# Altium PCB BOARD.PcbDoc
Units mm, origin at the board's own origin, x right, y up, seen from the top; angles counter-clockwise.
Board outline 25.6 x 34.2 mm, 2 copper layers (Top Layer, Bottom Layer), stack 0.46 mm thick; 48 components, 35 nets, 178 pads, 118 vias.
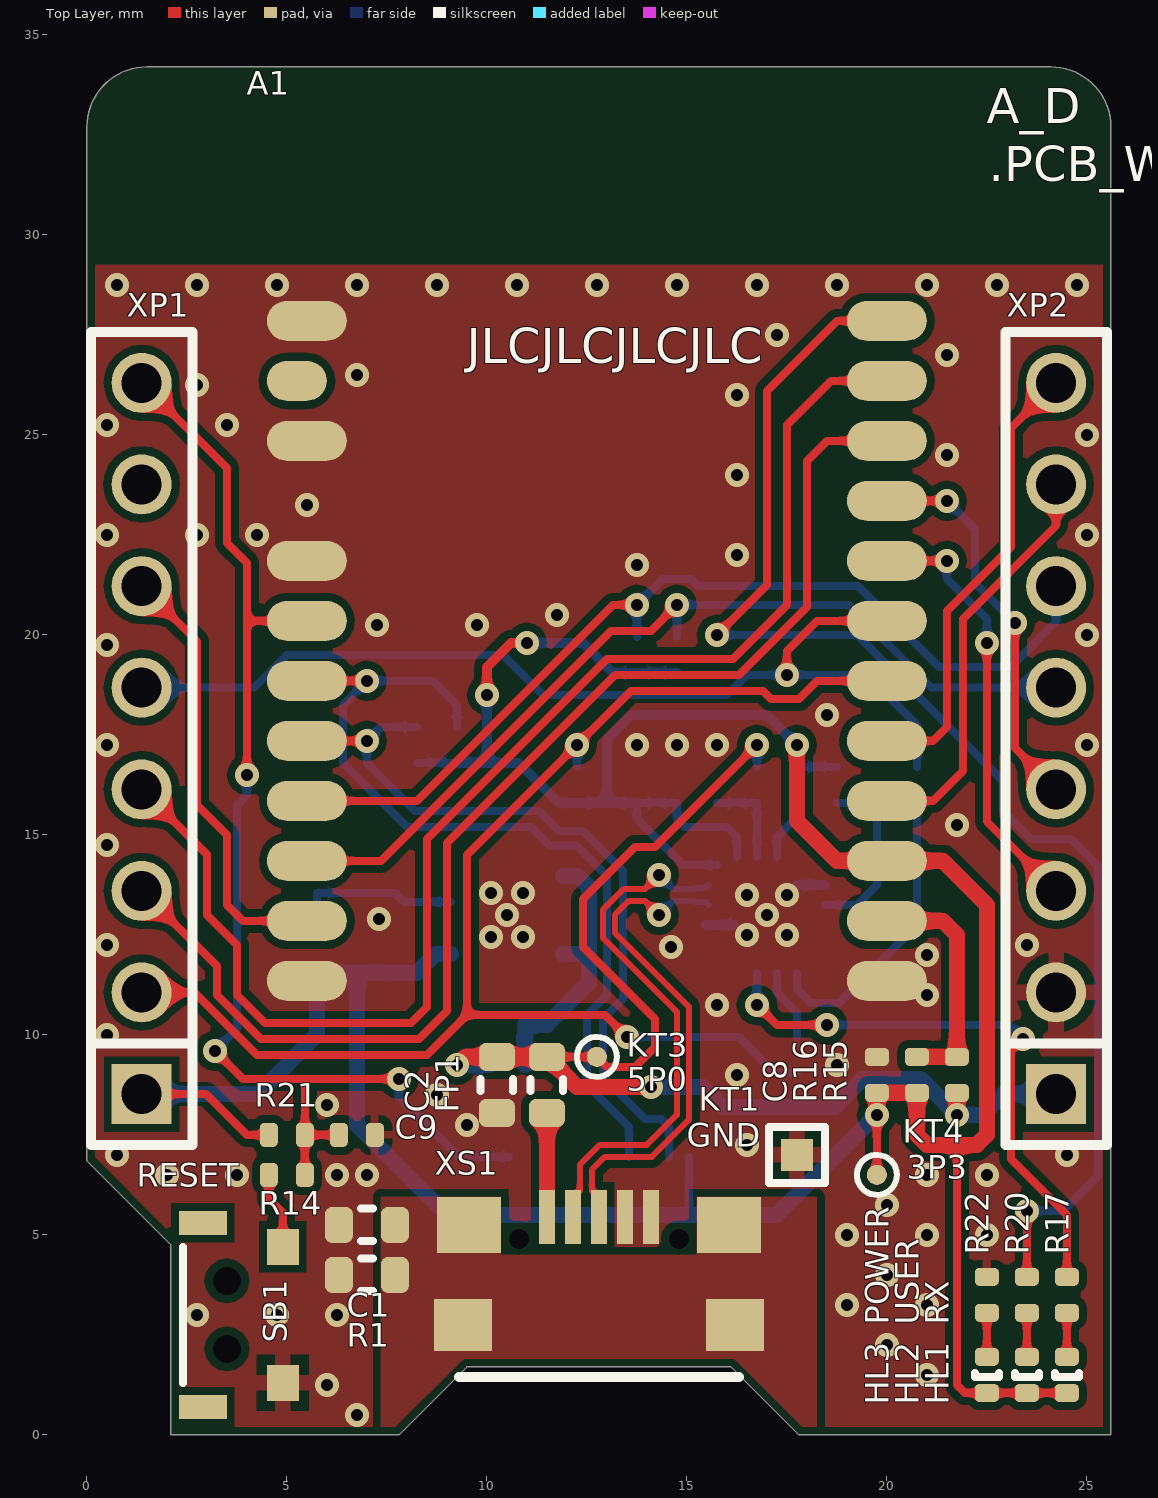
[diagram p0: Top Layer view]
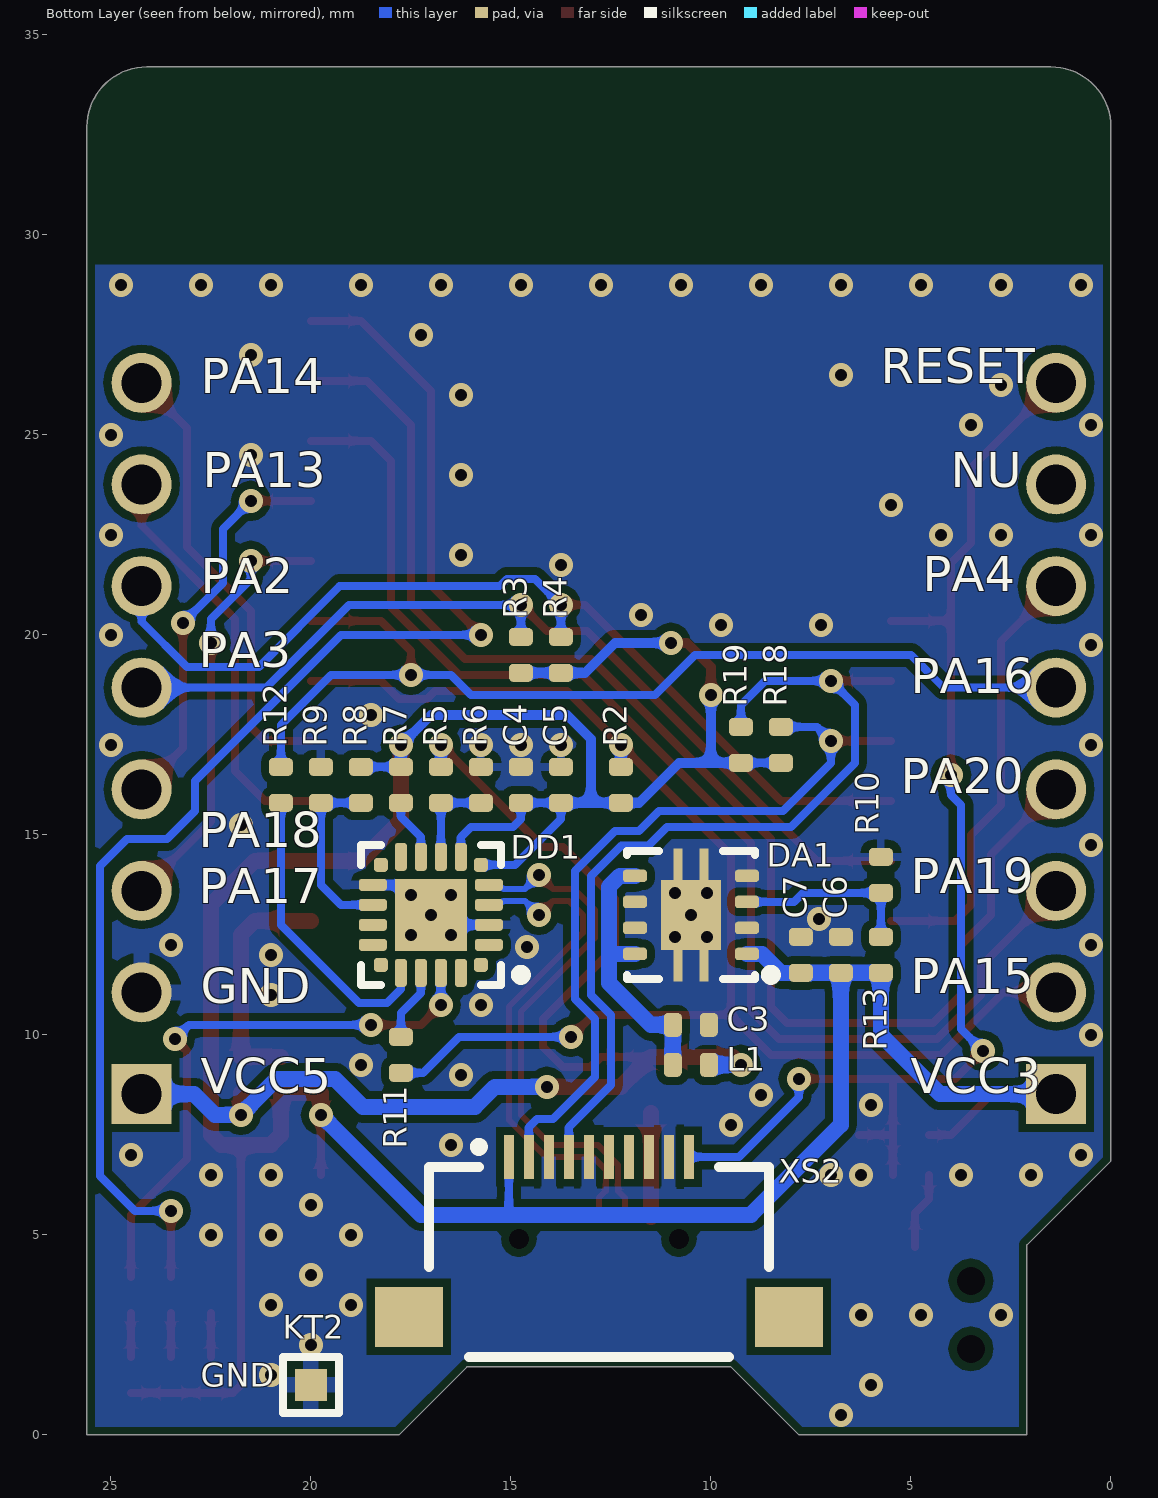
[diagram p1: Bottom Layer view, seen from below]
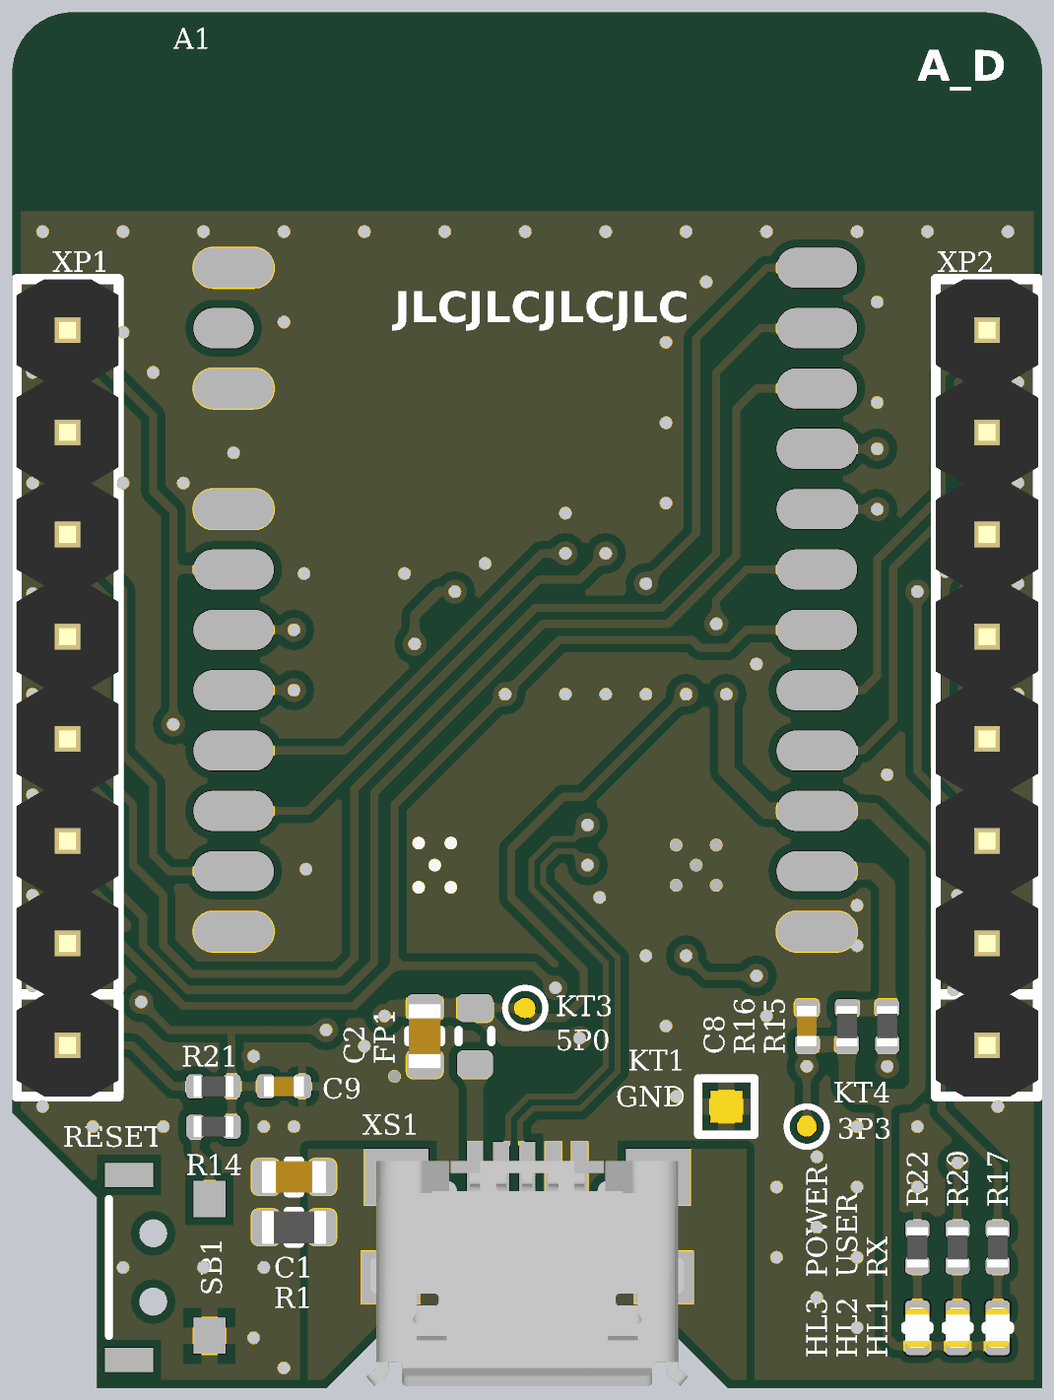
[diagram p2: 3D render of the assembled board from above, using the file's embedded part models]
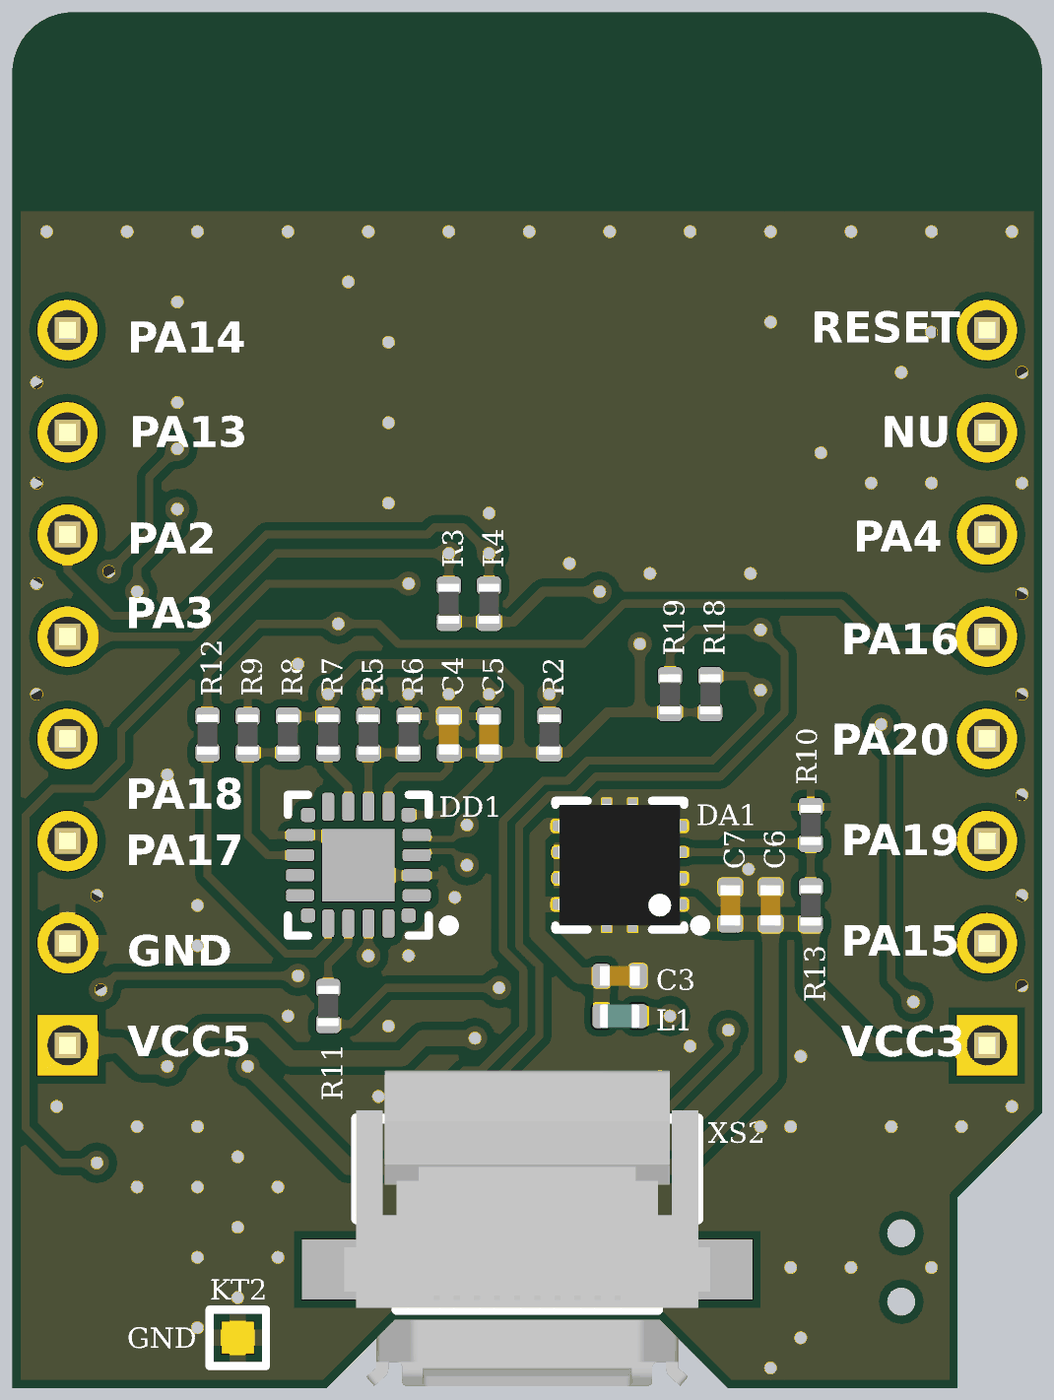
[diagram p3: 3D render of the assembled board from below, using the file's embedded part models]

## Layer stack, top to bottom
Top Solder: solder mask 0.01, Solder Resist, Dk 3.5
Top Layer: signal copper 0.03
Dielectric1: core 0.4, FR-4, Dk 4.2
Bottom Layer: signal copper 0.03
Bottom Solder: solder mask 0.01, Solder Resist, Dk 3.5

## Board outline
2.1,0 2.1,4.75 0,6.85 0,32.7 cw(c1.5,32.7) 1.5,34.2 24.1,34.2 cw(c24.1,32.7) 25.6,32.7 25.6,0 17.8,0 16.1,1.7 9.5,1.7 7.8,0

## Design rules (kind name [scope] priority, off if disabled: settings)
AssemblyTestPointUsage [All] p1 off:
AssemblyTestpoint [All] p1 off: testpointundercomponent=TRUE minsize=1.016 maxsize=2.54 preferedsize=1.524 minholesize=0 maxholesize=1.016 preferedholesize=0.813 testpointgrid=0.025 usegrid=TRUE gridtolerance=0 allowsidetop=TRUE allowsidebottom=TRUE
BoardOutlineClearance [All] p1: gap=0.2 ignorepadtopadclearanceinfootprint=FALSE
Clearance Clearance_ANT [InNetClass('ANT_Class') vs InPolygon] p1: gap=0.6 ignorepadtopadclearanceinfootprint=FALSE except(0: Arc-Hole Track-Hole SMDPad-Hole THPad-Hole Via-Hole Fill-Hole Poly-Hole Region-Hole Text-Hole)
Clearance Clearance_GND_Poly [(InNet('GND') AND InPolygon )] p2: gap=0.2 ignorepadtopadclearanceinfootprint=FALSE except(0: Arc-Hole Track-Hole SMDPad-Hole THPad-Hole Via-Hole Fill-Hole Poly-Hole Region-Hole Text-Hole)
Clearance [All] p3: gap=0.15 ignorepadtopadclearanceinfootprint=FALSE except(0: Arc-Hole Track-Hole SMDPad-Hole THPad-Hole Via-Hole Fill-Hole Poly-Hole Region-Hole Text-Hole)
ComponentClearance [All] p1 off: gap=0.25 collisioncheckmode=3 verticalgap=0.25 showdistances=FALSE
DiffPairsRouting [All] p1: maxlimit=0.4 minlimit=0.15 mostfreqgap=0.2 toplayer_minwidth=0.15 toplayer_maxwidth=0.4 toplayer_prefwidth=0.15 bottomlayer_minwidth=0.15 bottomlayer_maxwidth=0.4 bottomlayer_prefwidth=0.15 maxuncoupledlength=12
FabricationTestPointUsage [All] p1 off: valid=0 allowmultiple=FALSE
FabricationTestpoint [All] p1 off: side=3 testpointundercomponent=TRUE minsize=1.016 maxsize=2.54 preferedsize=1.524 minholesize=0 maxholesize=1.016 preferedholesize=0.813 testpointgrid=0.025 allowsidetop=TRUE allowsidebottom=TRUE usegrid=TRUE gridtolerance=0
Height [All] p1: minheight=0 maxheight=25 prefheight=25
HoleSize [All] p1: absolutevalues=TRUE maxlimit=6 minlimit=0.3 maxpercent=80.000 minpercent=20.000
HoleToHoleClearance [All] p1: gap=0.25 allowstackedmicrovias=TRUE
MatchedLengths "Schematic Matched Net Lengths_3" [InNet('USBD_N')] p1: tolerance=1 checknetsindiffpair=TRUE checkdiffpairvsdiffpair=FALSE checkxsignals=FALSE checkothers=FALSE
MatchedLengths "Schematic Matched Net Lengths_2" [InNet('USBD_P')] p2: tolerance=1 checknetsindiffpair=TRUE checkdiffpairvsdiffpair=FALSE checkxsignals=FALSE checkothers=FALSE
MinimumSolderMaskSliver [All] p1 off: minsoldermaskwidth=0.254
PlaneClearance [All] p1: clearance=0.5
PlaneConnect [All] p1: planeconnectstyle=Relief reliefexpansion=0.5 reliefentries=4 reliefconductorwidth=0.25 reliefairgap=0.25
PolygonConnect PolygonConnect_DirectConnect [InComponentClass('DirectConnect')] p1: connectstyle=Direct reliefconductorwidth=0.254 reliefentries=4 polygonreliefangle="90 Angle" airgapwidth=0.254
PolygonConnect PolygonConnect_Components [InComponent('C*') OR InComponent('R*') OR InComponent('NR*') OR InComponent('DA*') OR InComponent('DD*') OR InComponent('HL*')] p2: connectstyle=Relief reliefconductorwidth=0.2 reliefentries=4 polygonreliefangle="90 Angle" airgapwidth=0.2
PolygonConnect PolygonConnect_Connectors [All vs (InPadClass('All Pads'))] p3: connectstyle=Relief reliefconductorwidth=0.4 reliefentries=4 polygonreliefangle="90 Angle" airgapwidth=0.25
PolygonConnect PolygonConnect_Via [All] p4: connectstyle=Direct reliefconductorwidth=0.254 reliefentries=4 polygonreliefangle="90 Angle" airgapwidth=0.254
RoutingCorners [All] p1: cornerstyle=45-Degree minsetback=1.5 maxsetback=3.5
RoutingVias [All] p1: holewidth=0.6 width=1.2 viastyle="Through Hole" minholewidth=0.3 minwidth=0.6 maxholewidth=1 maxwidth=2
SMDEntry [All] p1: side=TRUE corner=TRUE anyangle=TRUE
SilkToSilkClearance [All] p1 off: silktosilkclearance=0.254
SilkToSolderMaskClearance [IsPad] p1 off: minsilkscreentomaskgap=0.254 clearancetoexposedcopper=TRUE
SolderMaskExpansion [All] p1: expansion=0.025
Width [All] p1: maxlimit=8 minlimit=0.15 preferedwidth=0.6
Width Width_TrackEnds [All] p2 off: maxlimit=0.25 minlimit=0.25 preferedwidth=0.25 checkconnectedcopper=TRUE
15 further rules are at their usual default settings.

## Classes and differential pairs
component class DirectConnect: A1 C1 C2 C3 C4 C6 C7 C8 DA1 L1 R1 XS1
differential pair class USB: USBD
differential pair USBD: +USBD_P -USBD_N

## Components (designator, comment, footprint, x,y, rotation, side; value= is the part's Value field where it differs from the comment)
A1 "AFM201Tx-Series" AFM201Tx-Series 12.75,22.25 r0 top locked value=AFM201TI
C1 "Capacitor" C0603_L 7,5.25 r0 top value=0.1uF
C2 "Capacitor" C0603_L 10.25,8.75 r90 top value=10uF
C3 "Capacitor" C0402_L 10.5,10.25 r0 bottom value=4.7uF
C4 "Capacitor" C0402_L 14.75,16.25 r270 bottom value=4.7uF
C5 "Capacitor" C0402_L 13.75,16.25 r270 bottom value=0.1uF
C6 "Capacitor" C0402_L 6.75,12 r270 bottom value=4.7uF
C7 "Capacitor" C0402_L 7.75,12 r270 bottom value=4.7uF
C8 "Capacitor" C0402_L 19.75,9 r270 top value=4.7uF
C9 "Capacitor" C0402_L 6.75,7.5 r180 top value=0.1uF
DA1 "TPS73701DRB" VSON-8_065P300X300X100_N 10.5,13 r90 bottom value=TPS73701DRBR
DD1 "CP2102N-xxx-GQFN20" QFN-20_050P300X300X080_N 17,13 r0 bottom value=CP2102N-A01-GQFN20
FP1 "Fuse_PTC" F0603_L_H075 11.5,8.75 r90 top value=0603L100SLYR
HL1 "RX" LD0402_L 24.5,1.5 r90 top value=KPHHS-1005SURCK
HL2 "USER" LD0402_L 23.5,1.5 r90 top value=KPHHS-1005QBC-D-V
HL3 "POWER" LD0402_L 22.5,1.5 r90 top value=KPHHS-1005CGCK
KT1 "GND" TP-SMT-R-0.8mm 17.75,7 r0 top value=TestPoint-SMT
KT2 "GND" TP-SMT-R-0.8mm 20,1.25 r180 bottom value=TestPoint-SMT
KT3 "5P0" TP-SMT-C-0.5mm 12.75,9.45 r0 top value=TestPoint-SMT
KT4 "3P3" TP-SMT-C-0.5mm 19.75,6.5 r0 top value=TestPoint-SMT
L1 "FerriteBead" L0402_L 10.5,9.25 r0 bottom value=BLM15PD121SN1D
R1 "Resistor" R0603_L 7,4 r0 top value=0
R2 "Resistor" R0402_L 12.25,16.25 r90 bottom value=10k
R3 "Resistor" R0402_L 14.75,19.5 r90 bottom value=10k
R4 "Resistor" R0402_L 13.75,19.5 r90 bottom value=10k
R5 "Resistor" R0402_L 16.75,16.25 r270 bottom value=22.1k
R6 "Resistor" R0402_L 15.75,16.25 r270 bottom value=47k
R7 "Resistor" R0402_L 17.75,16.25 r90 bottom value=10k
R8 "Resistor" R0402_L 18.75,16.25 r90 bottom value=10k
R9 "Resistor" R0402_L 19.75,16.25 r270 bottom value=0
R10 "Resistor" R0402_L 5.75,14 r270 bottom value=12k
R11 "Resistor" R0402_L 17.75,9.5 r270 bottom value=0
R12 "Resistor" R0402_L 20.75,16.25 r90 bottom value=0
R13 "Resistor" R0402_L 5.75,12 r270 bottom value=22.1k
R14 "Resistor" R0402_L 5,6.5 r0 top value=20
R15 "Resistor" R0402_L 21.75,9 r270 top value=0
R16 "Resistor" R0402_L 20.75,9 r270 top value=0
R17 "Resistor" R0402_L 24.5,3.5 r270 top value=1k
R18 "Resistor" R0402_L 8.25,17.25 r90 bottom value=10k
R19 "Resistor" R0402_L 9.25,17.25 r90 bottom value=10k
R20 "Resistor" R0402_L 23.5,3.5 r270 top value=1k
R21 "Resistor" R0402_L 5,7.5 r0 top value=10k
R22 "Resistor" R0402_L 22.5,3.5 r270 top value=1k
SB1 "RESET" 1TS003B-Series 3.5,3 r90 top locked value=1TS003B-1600-3500A-CT
XP1 "Text" PLS-8 1.37,17.41 r90 top locked value=PLS-8
XP2 "Text" PLS-8 24.23,17.41 r90 top locked value=PLS-8
XS1 "Text" 1981568-1 12.8,3 r0 top locked value=1981568-1
XS2 "JTAG" XF2M-1015-1A 12.8,4.7 r0 bottom locked value=XF2M-1015-1A

## Footprints (in the part's own frame and the unit in brackets; to place one, negate y for a bottom-side part, rotate by r counter-clockwise, add the part's x,y. Pads: shape width x height; smd on the part's side, far side on the other; paste and mask are expansions set on the pad)
1TS003B-Series [mm]
  rect 0.6x1.2 smd: 0(-2.3,0.6) 0(2.3,0.6)
  round 0.1 hole 0.7 unplated: 0(-0.85,0) 0(0.85,0)
  rect 0.9x0.8 smd: 1(-1.7,-1.4) 2(1.7,-1.4)
  silkscreen extent -1.7,1.1 1.7,1.1
1981568-1 [mm]
  round 0 hole 0.5 unplated: 0(-2,1.9) 0(2,1.9)
  rect 0.4x1.35 smd: 1(-1.3,2.45) 2(-0.65,2.45) 3(0,2.45) 4(0.65,2.45) 5(1.3,2.45)
  rect 1.45x1.3 smd: 6(-3.4,-0.25) 6(3.4,-0.25)
  rect 1.6x1.4 smd: 6(-3.25,2.25) 6(3.25,2.25)
  silkscreen extent -3.5,-1.55 3.5,-1.55, body extent -4,-2.95 4,2.65, height 2.79
AFM201Tx-Series [mm]
  oval 2x1 smd: 1(-7.25,5.6) 3(-7.25,2.6) 4(-7.25,-0.4) 5(-7.25,-1.9) 6(-7.25,-3.4) 7(-7.25,-4.9) 8(-7.25,-6.4) 9(-7.25,-7.9) 10(-7.25,-9.4) 11(-7.25,-10.9) 12(7.25,-10.9) 13(7.25,-9.4) 14(7.25,-7.9) 15(7.25,-6.4) 16(7.25,-4.9) 17(7.25,-3.4) 18(7.25,-1.9) 19(7.25,-0.4) 20(7.25,1.1) 21(7.25,2.6) 22(7.25,4.1) 23(7.25,5.6)
  oval 1.5x1 smd: 2(-7.5,4.1)
  Top Layer pour cut-out: 7.5,7 7.5,12 -7.5,12 -7.5,7
  Bottom Layer pour cut-out: 7.5,7 7.5,12 -7.5,12 -7.5,7
  body extent -7.5,-12 7.5,12, height 2.9
C0402_L [mm] "Chip Capacitor; Body 1.0 x 0.5 mm (LxW typ)"
  rrect50% 0.45x0.6 smd: 1(-0.45,0) 2(0.45,0)
  body extent -0.5,-0.25 0.5,0.25, height 0.61
C0603_L [mm] "Chip Capacitor; Body 1.6 x 0.8 mm (LxW typ)"
  rrect50% 0.7x0.9 smd: 1(-0.7,0) 2(0.7,0)
  silkscreen extent -0.15,-0.41 0.15,0.41, body extent -0.8,-0.4 0.8,0.4, height 0.91
F0603_L_H075 [mm] "1608M"
  rrect50% 0.7x0.9 smd: 1(-0.7,0) 2(0.7,0)
  silkscreen extent -0.15,-0.41 0.15,0.41, body extent -0.8,-0.4 0.8,0.4, height 0.75
L0402_L [mm] "Chip Coil; Body 1.0 x 0.5 mm (LxW typ)"
  rrect50% 0.45x0.6 smd mask+0.05: 1(-0.452,0) 2(0.452,0)
  body extent -0.5,-0.3 0.5,0.3, height 0.5
LD0402_L [mm] "Chip Led; Body 1.0 x 0.5 mm (LxW typ)"
  rrect50% 0.45x0.6 smd mask+0.05: 1(-0.452,0) 2(0.452,0)
  silkscreen extent -0.05,-0.3 0.05,0.3, body extent -0.5,-0.3 0.5,0.3, height 0.2
PLS-8 [mm]
  rect 1.5x1.5 hole 1: 1(-8.89,0)
  round 1.5 hole 1: 2(-6.35,0) 3(-3.81,0) 4(-1.27,0) 5(1.27,0) 6(3.81,0) 7(6.35,0) 8(8.89,0)
  silkscreen extent -10.16,-1.27 10.16,1.27, body extent -10.16,-1.27 10.16,1.27, height 8.9
QFN-20_050P300X300X080_N [mm]
  rrect50% 0.35x0.35 smd: 1(-1.25,1.25) 6(-1.25,-1.25) 11(1.25,-1.25) 16(1.25,1.25)
  rrect50% 0.7x0.3 smd: 2(-1.45,0.75) 3(-1.45,0.25) 4(-1.45,-0.25) 5(-1.45,-0.75) 12(1.45,-0.75) 13(1.45,-0.25) 14(1.45,0.25) 15(1.45,0.75)
  rrect50% 0.3x0.7 smd: 7(-0.75,-1.45) 8(-0.25,-1.45) 9(0.25,-1.45) 10(0.75,-1.45) 17(0.75,1.45) 18(0.25,1.45) 19(-0.25,1.45) 20(-0.75,1.45)
  rect 1.8x1.8 smd: TP(0,0)
  silkscreen extent -2.37,-1.75 1.75,1.75, body extent -1.5,-1.5 1.5,1.5, height 0.8
R0402_L [mm] "Chip Resistor; Body 1.0 x 0.5 mm (LxW typ)"
  rrect50% 0.45x0.6 smd: 1(-0.45,0) 2(0.45,0)
  body extent -0.5,-0.26 0.5,0.26, height 0.36
R0603_L [mm] "Chip Resistor; Body 1.6 x 0.8 mm (LxW typ)"
  rrect50% 0.7x0.9 smd: 1(-0.7,0) 2(0.7,0)
  silkscreen extent -0.15,-0.41 0.15,0.41, body extent -0.8,-0.41 0.8,0.41, height 0.46
TP-SMT-C-0.5mm [mm]
  round 0.5 smd paste-1: 1(0,0)
  silkscreen extent -0.5,-0.5 0.5,0.5
TP-SMT-R-0.8mm [mm]
  rect 0.8x0.8 smd paste-1: 1(0,0)
  silkscreen extent -0.7,-0.7 0.7,0.7
VSON-8_065P300X300X100_N [mm]
  rrect50% 0.31x0.6 smd paste-0.025: 1(-0.975,-1.4) 2(-0.325,-1.4) 3(0.325,-1.4) 4(0.975,-1.4) 5(0.975,1.4) 6(0.325,1.4) 7(-0.325,1.4) 8(-0.975,1.4)
  rect 0.825x0.23 smd: TP(-1.25,-0.325) TP(-1.25,0.325) TP(1.25,-0.325) TP(1.25,0.325)
  rect 1.75x1.5 smd: TP(0,0)
  silkscreen extent -1.62,-2.12 1.6,1.6, body extent -1.52,-1.52 1.52,1.52, height 1.04
XF2M-1015-1A [mm]
  rect 0.25x1.1 smd mask+0.025: 1(2.25,-2.25) 2(1.75,-2.25) 3(1.25,-2.25) 4(0.75,-2.25) 5(0.25,-2.25) 6(-0.25,-2.25) 7(-0.75,-2.25) 8(-1.25,-2.25) 9(-1.75,-2.25) 10(-2.25,-2.25)
  rect 1.7x1.5 smd mask+0.025: SH(-4.75,1.75) SH(4.75,1.75)
  silkscreen extent -4.25,-2.6 4.25,2.75, body extent -4.55,-3.2 4.55,2.7, height 2

## Part data
A1: library part AFM201TI, Manufacturer=99IOT, Operation Frequency=100MHz, Supply Current=200mA, Working Temperature Max=+85°С, Working Temperature Min=-20°С, Application Category=1, ClassName=DirectConnect, Functional Analog="AFM201TO, AFM201TP", I/O Lines=14, ID=7, Part Number=AFM201TI, Published=25.11.2019, Publisher="Andrew Danich", ROM/RAM=384K+2MB/256KB, Supply Operation=+3.0…3.6V, Supported Interfaces="SWD, SPI, I2C, UART, PWM, SDIO, RTC", Type=Модуль, Wireless Compatibility="802.11 b/g/n, Bluetooth 4.2"
C1: library part GRM188R72A104KA35D, Dielectric Type=X7R, Manufacturer=Murata, Tolerance=±10%, Voltage=100V, Working Temperature Max=+125°С, Working Temperature Min=-55°С, Application Category=1, ClassName=DirectConnect, ID=232, Part Number=GRM188R72A104KA35D, Published=18.05.2010, Publisher="Andrew Danich", Type=Конденсатор
C2: library part GRM188R60J106ME47D, Dielectric Type=X5R, Manufacturer=Murata, Tolerance=±20%, Voltage=6.3V, Working Temperature Max=+85°С, Working Temperature Min=-55°С, Application Category=1, ClassName=DirectConnect, ID=136, Part Number=GRM188R60J106ME47D, Published=18.05.2010, Publisher="Andrew Danich", Type=Конденсатор
C3 C4 C6 C7 C8: library part GRM155R60J475ME87D, Dielectric Type=X5R, Manufacturer=Murata, Tolerance=±20%, Voltage=6.3V, Working Temperature Max=+85°С, Working Temperature Min=-55°С, Application Category=1, ClassName=DirectConnect, ID=223, Part Number=GRM155R60J475ME87D, Published=18.05.2010, Publisher="Andrew Danich", Type=Конденсатор
C5 C9: library part GCM155R71C104KA55D, Dielectric Type=X7R, Manufacturer=Murata, Tolerance=±10%, Voltage=16V, Working Temperature Max=+125°С, Working Temperature Min=-55°С, Application Category=1, Functional Analog=GRM155R71C104KA88D, ID=163, Part Number=GCM155R71C104KA55D, Published=18.05.2010, Publisher="Andrew Danich", Type=Конденсатор
DA1: library part TPS73701DRBR, Input Voltage=+2.2…5.5V, Manufacturer="Texas Instruments", Output Current=1A, Output Voltage=+1.2…5.5V, Working Temperature Max=+125°С, Working Temperature Min=-40°С, Application Category=1, ClassName=DirectConnect, Functional Analog=TPS73701DRBT, ID=26, Part Number=TPS73701DRBR, Published=25.03.2019, Publisher="Andrew Danich", Type=Микросхема
DD1: library part CP2102N-A01-GQFN20, Manufacturer="Silicon Labs", Supply Current=13.7mA, Working Temperature Max=+85°C, Working Temperature Min=-40°C, Application Category=1, Channels=1, Functional Analog=CP2102N-A02-GQFN20, ID=14, Input Interface=UART, OTG Support=No, Part Number=CP2102N-A01-GQFN20, Published=16.07.2019, Publisher="Andrew Danich", Supply Operation=+3.0…3.6V, Type=Микросхема, USB Speed Support="12 Mb/s", USB Type Support="USB 2.0"
FP1: library part 0603L100SLYR, Current Rating Max=50A, Hold Current=1A, Limit Voltage=6V, Manufacturer=Littelfuse, Resistance=0.12ohm, Trip Current=1.8A, Working Temperature Max=+85°С, Working Temperature Min=-40°С, Application Category=1, Functional Analog=-, ID=13, Part Number=0603L100SLYR, Published=25.0.2017, Type="Предохранитель самовосстанавливающийся"
HL1: library part KPHHS-1005SURCK, Color=Red, Forward Current=20mA, Forward Voltage=2.5V, Manufacturer=Kingbright, Power Dissipation=75mW, Working Temperature Max=+85°С, Working Temperature Min=-40°С, Application Category=1, ID=35, Leds=1, Luminous Flux=140, Part Number=KPHHS-1005SURCK, Published=03.12.2013, Publisher="Andrew Danich", Type="Индикатор единичный"
HL2: library part KPHHS-1005QBC-D-V, Color=Blue, Forward Current=20mA, Forward Voltage=3.3V, Manufacturer=Kingbright, Power Dissipation=120mW, Working Temperature Max=+85°С, Working Temperature Min=-40°С, Application Category=1, ID=24, Leds=1, Luminous Flux=60, Part Number=KPHHS-1005QBC-D-V, Published=03.12.2013, Publisher="Andrew Danich", Type="Индикатор единичный"
HL3: library part KPHHS-1005CGCK, Color=Green, Forward Current=20mA, Forward Voltage=2.1V, Manufacturer=Kingbright, Power Dissipation=75mW, Working Temperature Max=+85°С, Working Temperature Min=-40°С, Application Category=1, ID=25, Leds=1, Luminous Flux=60, Part Number=KPHHS-1005CGCK, Published=03.12.2013, Publisher="Andrew Danich", Type="Индикатор единичный"
KT1 KT2: library part TestPoint-SMT-GND, Manufacturer=-, Application Category=1, Application Type="On PCB Test Point", Functional Analog=-, ID=7, Part Number=TestPoint-SMT-GND, Published=03.03.2015, Publisher="Andrew Danich"
KT3 KT4: library part TestPoint-SMT, Manufacturer=-, Application Category=1, Application Type="On PCB Test Point", Functional Analog=-, ID=6, Part Number=TestPoint-SMT, Published=03.03.2015, Publisher="Andrew Danich"
L1: library part BLM15PD121SN1D, DC Resistance=0.09ohm, Inductor Type=EMIFIL, Manufacturer=Murata, Rated Current=1.3A, Tolerance=±25%, Working Temperature Max=+125°С, Working Temperature Min=-55°С, Application Category=1, ClassName=DirectConnect, ID=11, Impedance at 100Mhz=120ohm, Part Number=BLM15PD121SN1D, Published=14.11.2014, Publisher="Andrew Danich", Type=Дроссель
R1: library part RC0603JR-070R, Limit Voltage=50V, Manufacturer=Yageo, Temperature Coefficient=100ppm, Tolerance=±5%, Total Power Dissipation=0.1W, Working Temperature Max=+155°С, Working Temperature Min=-55°С, Application Category=1, ClassName=DirectConnect, Functional Analog="RC0603FR-070RL, CR0603-J/-000E", ID=5, Part Number=RC0603JR-070R, Published=24.03.2010, Publisher="Andrew Danich", Series Type=Thick-Film, Type=Резистор
R2 R3 R4 R7 R8 R18 R19 R21: library part RC0402JR-0710KL, Limit Voltage=50V, Manufacturer=Yageo, Temperature Coefficient=100ppm, Tolerance=±5%, Total Power Dissipation=0.1W, Working Temperature Max=+155°С, Working Temperature Min=-55°С, Application Category=1, ID=476, Part Number=RC0402JR-0710KL, Published=24.03.2010, Publisher="Andrew Danich", Series Type=Thick-Film, Type=Резистор
R5 R13: library part RC0402FR-0722K1L, Limit Voltage=50V, Manufacturer=Yageo, Temperature Coefficient=100ppm, Tolerance=±1%, Total Power Dissipation=0.1W, Working Temperature Max=+155°С, Working Temperature Min=-55°С, Application Category=1, ID=447, Part Number=RC0402FR-0722K1L, Published=24.03.2010, Publisher="Andrew Danich", Series Type=Thick-Film, Type=Резистор
R6: library part RC0402FR-0747KL, Limit Voltage=50V, Manufacturer=Yageo, Temperature Coefficient=100ppm, Tolerance=±1%, Total Power Dissipation=0.1W, Working Temperature Max=+155°С, Working Temperature Min=-55°С, Application Category=1, ID=528, Part Number=RC0402FR-0747KL, Published=24.03.2010, Publisher="Andrew Danich", Series Type=Thick-Film, Type=Резистор
R9 R11 R12 R15 R16: library part RC0402JR-070RL, Limit Voltage=50V, Manufacturer=Yageo, Temperature Coefficient=100ppm, Tolerance=±5%, Total Power Dissipation=0.1W, Working Temperature Max=+155°С, Working Temperature Min=-55°С, Application Category=1, ID=362, Part Number=RC0402JR-070RL, Published=24.03.2010, Publisher="Andrew Danich", Series Type=Thick-Film, Type=Резистор
R10: library part RC0402FR-0712KL, Limit Voltage=50V, Manufacturer=Yageo, Temperature Coefficient=100ppm, Tolerance=±1%, Total Power Dissipation=0.1W, Working Temperature Max=+155°С, Working Temperature Min=-55°С, Application Category=1, ID=318, Part Number=RC0402FR-0712KL, Published=24.03.2010, Publisher="Andrew Danich", Series Type=Thick-Film, Type=Резистор
R14: library part RC0402JR-0720RL, Limit Voltage=50V, Manufacturer=Yageo, Temperature Coefficient=100ppm, Tolerance=±5%, Total Power Dissipation=0.1W, Working Temperature Max=+155°С, Working Temperature Min=-55°С, Application Category=1, ID=369, Part Number=RC0402JR-0720RL, Published=24.03.2010, Publisher="Andrew Danich", Series Type=Thick-Film, Type=Резистор
R17 R20 R22: library part RC0402JR-071KL, Limit Voltage=50V, Manufacturer=Yageo, Temperature Coefficient=100ppm, Tolerance=±5%, Total Power Dissipation=0.1W, Working Temperature Max=+155°С, Working Temperature Min=-55°С, Application Category=1, ID=3, Part Number=RC0402JR-071KL, Published=24.03.2010, Publisher="Andrew Danich", Series Type=Thick-Film, Type=Резистор
SB1: library part 1TS003B-1600-3500A-CT, Isolator Resistance=100meg, Limit Current=50mA, Limit Voltage=12V, Manufacturer="Hongyuan Precision", Resistance=0.1ohm, Application Category=1, Backlight=NO, Functional Analog=1TS003B-1800-3500A-CT, Height=1.82mm, ID=38, Number of Contacts=2, Part Number=1TS003B-1600-3500A-CT, Published=17.04.2014, Publisher="Andrew Danich", Type=Переключатель
XP1 XP2: library part PLS-8, Limit Current=3A, Limit Voltage=250V, Resistance=15momh, Application Category=1, Connector Type=Male, ID=7, Part Number=PLS-8, Pins=8, Pitch=2.54mm, Published=07.03.2013, Publisher="Andrew Danich", Surface Finish=Gold, Type=Вилка
XS1: library part 1981568-1, Limit Current=1A, Limit Voltage=24V, Manufacturer="TE Connectivity", Application Category=1, ClassName=DirectConnect, Connector Type=Female, ID=30, Interface="USB 2.0", Max Data Rate="480 mbps", Mount Type=Surface, Part Number=1981568-1, Pins=9, Published=11.04.2016, Publisher="Andrew Danich", Type=Розетка
XS2: library part XF2M-1015-1A, Limit Current=500mA, Limit Voltage=50V, Manufacturer="Omron Electronics", Resistance=0.05ohm, Working Temperature Max=+85°С, Working Temperature Min=-30°С, Application Category=1, Connector Type=Female, ID=7, Part Number=XF2M-1015-1A, Pins=10, Pitch=0.5mm, Published=07.09.2015, Publisher="Viktor Klishin", Series=FPC, Type=Розетка

## Via types
v1: diameter 0.6, hole 0.3, Top Layer to Bottom Layer, tented both sides, 118 vias

## Nets (pads, with @x,y where several pads share a name; then routed paths per layer and width w, separated by ;. In a path a pad name is that pad's centre, name@x,y a point inside that pad or via, vN(x,y) a via of type N, cw(c..) or ccw(c..) an arc to the next point about the centre after c; other vN are vias at no path point)
GND: A1.1 A1.3 A1.4 A1.11 A1.12 C1.1 C2.1 C3.1 C4.1 C5.1 C6.1 C7.1 C8.1 C9.1 DA1.2 DA1.4 DA1.6 DA1.7 DA1.TP DD1.3 DD1.12 DD1.TP KT1.1 KT2.1 R1.1 R6.1 R9.1 R10.1 R22.1 SB1.1 XP2.2 XS1.4 XS1.5 XS2.3 XS2.5 XS2.9 | length 1.4
  Bottom Layer w0.25: DD1.3@15.475,12.75 DD1.TP@16.175,12.75 ; DD1.TP@17.75,13.75 DD1.12
  other v1: 6.75,0.5 6,1.25 21,1.5 20,2.25 2.75,3 4.75,3 6.25,3 19,3.25 21,3.25 20,4 19,5 21,5 22.5,5 20,5.75 2,6.5 3.75,6.5 6.25,6.5 7,6.5 21,6.5 22.5,6.5 0.75,7 24.5,7 16.5,7.25 9.5,7.75 6,8.25 8.75,8.5 16.25,9 18.75,9.25 0.5,10 15.75,10.75 21,11 21,12 14.6,12.2 0.5,12.25 23.5,12.25 10.1,12.45 10.9,12.45 16.5,12.5 17.5,12.5 7.3,12.9 10.5,13 17,13 16.5,13.5 17.5,13.5 10.1,13.55 10.9,13.55 0.5,14.75 21.75,15.25 0.5,17.25 13.75,17.25 14.75,17.25 15.75,17.25 25,17.25 18.5,18 0.5,19.75 25,20 7.25,20.25 9.75,20.25 11.75,20.5 13.75,21.75 16.25,22 0.5,22.5 2.75,22.5 4.25,22.5 25,22.5 5.5,23.25 16.25,24 21.5,24.5 25,25 0.5,25.25 3.5,25.25 16.25,26 2.75,26.25 6.75,26.5 21.5,27 17.25,27.5 0.75,28.75 2.75,28.75 4.75,28.75 6.75,28.75 8.75,28.75 10.75,28.75 12.75,28.75 14.75,28.75 16.75,28.75 18.75,28.75 21,28.75 22.75,28.75 24.75,28.75
LED_RX_N: DD1.19 R17.1 | length 14.5
  Top Layer w0.2: v1(16.75,10.75) 17.25,10.25 v1(18.5,10.25) ; v1(23.4,9.9) 23.1,9.6 23.1,6.9 24.5,5.5 R17.1
  Bottom Layer w0.2: v1(16.75,10.75) DD1.19 ; v1(18.5,10.25) 23.05,10.25 v1(23.4,9.9)
NetA1_13: A1.13 R15.1 R16.1 | length 5.9
  Top Layer w0.4: A1.13 21.4,12.85 21.75,12.5 R15.1 R16.1
NetC3_2: C3.2 DA1.5 DA1.8 L1.2 | length 6.9
  Bottom Layer w0.4: L1.2 10.95,9.252 C3.2 11.5,10.25 12.55,11.3 12.55,12.047 ; DA1.8 12.528,12.025 12.55,12.047 ; DA1.5 12.275,13.975 12.55,13.7 12.55,12.047
NetDA1_3: DA1.3 R10.2 R13.1 | length 4.5
  Bottom Layer w0.2: R13.1 R10.2 7.7,13.55 7.925,13.325 DA1.3
NetDD1_8: DD1.8 R5.2 R6.2 | length 2.4
  Bottom Layer w0.2: R6.2 R5.2 DD1.8
NetDD1_9: DD1.9 R7.1 | length 1.6
  Bottom Layer w0.2: DD1.9 17.25,14.95 17.75,15.45 R7.1
NetDD1_13: DD1.13 R8.1 R9.2 | length 4.6
  Bottom Layer w0.2: DD1.13 19.25,13.25 19.75,13.75 R9.2 R8.1
NetDD1_17: DD1.17 R12.1 | length 7.4
  Bottom Layer w0.2: DD1.17 17.75,11.15 18.1,10.8 18.8,10.8 20.75,12.75 R12.1
NetDD1_18: DD1.18 R11.1 | length 1.8
  Bottom Layer w0.2: DD1.18 17.25,11.05 17.75,10.55 R11.1
NetHL1_2: HL1.2 R17.2 | length 1.1
  Top Layer w0.2: HL1.2 R17.2
NetHL2_2: HL2.2 R20.2 | length 1.1
  Top Layer w0.2: HL2.2 R20.2
NetHL3_2: HL3.2 R22.2 | length 1.1
  Top Layer w0.2: HL3.2 R22.2
NetR14_1: R14.1 SB1.2 | length 1.9
  Top Layer w0.2: R14.1 4.55,5.9 4.9,5.55 SB1.2
PA0: A1.6 R19.2 XS2.4 | length 22.3
  Top Layer w0.2: A1.6 v1(7,18.85)
  Bottom Layer w0.2: R19.2 9.25,18.25 8.65,18.85 v1(7,18.85) 6.4,18.25 6.4,16.8 8,15.2 11.1,15.2 11.562,14.738 12.237,14.738 13,13.975 13,11 12.5,10.5 12.5,8.75 13.55,7.7 XS2.4
PA1: A1.7 R18.2 XS2.2 | length 19.2
  Top Layer w0.2: A1.7 v1(7,17.35)
  Bottom Layer w0.2: R18.2 7.35,17.7 v1(7,17.35) 7,16.8 8.2,15.6 11.3,15.6 11.8,15.1 12.4,15.1 13.4,14.1 13.4,10.9 12.9,10.4 12.9,8.95 13.95,7.9 14.35,7.9 14.55,7.7 XS2.2
PA2: A1.8 R4.2 XP2.6 | length 24.1
  Top Layer w0.2: A1.8 8.25,15.85 13.15,20.75 v1(13.75,20.75)
  Bottom Layer w0.2: R4.2 v1(13.75,20.75) 14.4,21.4 15.1,21.4 15.28,21.22 19.28,21.22 21.3,19.2 23.1,19.2 24.23,20.33 XP2.6
PA3: A1.9 R3.2 XP2.5 | length 23
  Top Layer w0.2: A1.9 7.35,14.35 13.1,20.1 14.1,20.1 v1(14.75,20.75)
  Bottom Layer w0.2: R3.2 v1(14.75,20.75) 19.05,20.75 21.12,18.68 XP2.5
PA4: A1.10 XP1.6 | length 11
  Top Layer w0.2: XP1.6 2.75,19.84 2.75,15.75 3.5,15 3.5,13.25 3.9,12.85 A1.10
PA13: A1.15 XP2.7 | length 10.3
  Top Layer w0.2: A1.15 21.15,15.85 21.9,16.6 21.9,20.4 24.23,22.73 XP2.7
PA14: A1.16 XP2.8 | length 11.4
  Top Layer w0.2: A1.16 21.15,17.35 21.5,17.7 21.5,20.6 23.1,22.2 23.1,25.17 XP2.8
PA15: A1.17 R2.2 R11.2 XP1.2 | length 35.1
  Top Layer w0.2: XP1.2 2.69,11.06 4.25,9.5 8.5,9.5 9.5,10.5 ; v1(13.5,9.95) 12.95,10.5 9.5,10.5 ; A1.17 18.25,18.85 18.1,18.7 17.8,18.4 17.1,18.4 16.9,18.6 13.6,18.6 v1(12.25,17.25) 9.5,14.5 9.5,10.5
  Bottom Layer w0.2: R2.2 v1(12.25,17.25) ; v1(13.5,9.95) 16.3,9.95 17.2,9.05 R11.2
PA16: A1.18 R12.2 XP1.5 | length 25.3
  Top Layer w0.2: v1(17.5,19) 17.5,19.6 18.25,20.35 A1.18
  Bottom Layer w0.2: XP1.5 4.18,18.68 5,19.5 10.4,19.5 11.4,18.5 16,18.5 16.5,19 v1(17.5,19) 19.5,19 20.75,17.75 R12.2
PA17: A1.19 XP2.3 | length 10.9
  Top Layer w0.2: A1.19 v1(21.5,21.85) ; v1(22.5,19.8) 22.5,15.33 XP2.3
  Bottom Layer w0.2: v1(21.5,21.85) 21.5,21.4 22.5,20.4 v1(22.5,19.8)
PA18: A1.20 XP2.4 | length 9.8
  Top Layer w0.2: A1.20 v1(21.5,23.35) ; v1(23.2,20.3) 23.2,17.17 XP2.4
  Bottom Layer w0.2: v1(21.5,23.35) 22.2,22.65 22.2,21.3 v1(23.2,20.3)
PA19: A1.21 XP1.3 | length 31.4
  Top Layer w0.2: XP1.3 3.25,11.72 3.25,11 4.35,9.9 8.3,9.9 9,10.6 9,14.8 13.2,19 16.3,19 18,20.7 18,24.35 18.5,24.85 A1.21
PA20: A1.22 XP1.4 | length 34.4
  Top Layer w0.2: XP1.4 3,14.51 3,13 3.75,12.25 3.75,11 4.45,10.3 8.1,10.3 8.5,10.7 8.5,14.9 13,19.4 16.15,19.4 17.5,20.75 17.5,25.25 18.6,26.35 A1.22
PA23: A1.23 R20.1 | length 34.2
  Top Layer w0.2: v1(15.75,20) 17,21.25 17,26.1 18.75,27.85 A1.23 ; R20.1 v1(23.5,5.6)
  Bottom Layer w0.2: v1(15.75,20) 19.25,20 22.9,16.35 22.9,15.6 23.6,14.9 24.6,14.9 25.275,14.225 25.275,6.475 24.4,5.6 v1(23.5,5.6)
RESET_N: A1.5 C9.2 R14.2 R21.2 XP1.8 XS2.10 | length 31.6
  Top Layer w0.2: XP1.8 3.5,24.17 3.5,22.3 4,21.8 4,20.35 ; v1(3.2,9.6) 3.9,8.9 5.4,8.9 ; v1(4,16.5) 4,20.35 ; R14.2 R21.2 ; A1.5 4,20.35 ; C9.2 R21.2 ; v1(7.8,8.9) 5.4,8.9 ; 5.4,8.9 5.45,8.85 R21.2
  Bottom Layer w0.2: v1(3.2,9.6) 3.75,10.15 3.75,15.75 4,16 v1(4,16.5) ; v1(7.8,8.9) 7.8,8.45 9.3,6.95 XS2.10
SH: C1.2 R1.2 XS1.6
USBD_N: DD1.5 XS1.2 | length 13.4
  Top Layer w0.15: XS1.2 12.15,5.925 12.325,6.1 12.325,6.749 12.826,7.25 14,7.25 14.75,8 14.75,10.576 12.9,12.426 12.9,13.124 13.426,13.65 13.95,13.65 v1(14.3,14)
  Bottom Layer w0.15: v1(14.3,14) 14.65,13.65 14.975,13.65 15.187,13.65 15.212,13.675 15.475,13.675 DD1.5
USBD_P: DD1.4 XS1.3 | length 12.9
  Top Layer w0.15: XS1.3 12.8,5.925 12.625,6.1 12.625,6.625 12.95,6.95 14.124,6.95 15.05,7.876 15.05,10.7 13.2,12.55 13.2,13 13.55,13.35 13.95,13.35 v1(14.3,13)
  Bottom Layer w0.15: v1(14.3,13) 14.65,13.35 14.851,13.35 15.187,13.35 15.212,13.325 15.475,13.325 DD1.4
VBUS: FP1.1 XS1.1 | length 2.6
  Top Layer w0.4: XS1.1 FP1.1
VCC3P3: A1.14 C4.2 C5.2 C6.2 C7.2 C8.2 DA1.1 DD1.6 DD1.7 HL1.1 HL2.1 HL3.1 KT4.1 R2.1 R3.1 R4.1 R7.2 R8.2 R13.2 R16.2 R18.1 R19.1 R21.1 XP1.1 XS2.1 | length 90.6
  Top Layer w0.2: XP1.1 2.98,8.52 4,7.5 R21.1 ; KT4.1 v1(19.75,8) ; 21.75,7.25 21.75,1.25 21.952,1.048 HL3.1 HL2.1 HL1.1
  Top Layer w0.25: v1(10,18.5) 10,19.2 10.6,19.8 v1(11,19.8)
  Top Layer w0.4: v1(17.75,17.25) 17.75,15.35 18.75,14.35 A1.14 21.4,14.35 22.5,13.25 22.5,7.5 22.25,7.25 21.75,7.25 21,7.25 20.75,7.5 R16.2 C8.2 v1(19.75,8)
  Bottom Layer w0.2: R18.1 R19.1 ; 15.05,5.5 XS2.1 ; DD1.6 14.9,14.25 13.75,15.4 C5.2 C4.2 14.75,15.4 14.95,15.2 16,15.2 16.25,14.95 DD1.7 ; v1(17.75,17.25) R7.2 R8.2
  Bottom Layer w0.25: R19.1 10,16.8 ; v1(10,18.5) 10,16.8 ; v1(11,19.8) 12.4,19.8 13.15,19.05 R4.1 R3.1 ; C5.2 13,15.8 ; v1(17.75,17.25) 17,18 13.6,18 13,17.4 13,15.8 ; 10,16.8 10.8,16.8 11.8,15.8 R2.1 13,15.8
  Bottom Layer w0.4: XP1.1 4.27,8.52 5.75,10 R13.2 C6.2 ; DA1.1 8.725,12.025 8.25,11.55 C7.2 C6.2 ; v1(19.75,8) 17.25,5.5 15.05,5.5 9,5.5 6.75,7.75 C6.2
VCC5P0: C2.2 FP1.2 KT3.1 L1.1 R5.1 R15.2 XP2.1 | length 31.8
  Top Layer w0.2: FP1.2 KT3.1 13,9.2 13.7,9.2 14.2,9.7 14.2,10.4 12.4,12.2 12.4,13.4 13.7,14.7 14.2,14.7 v1(16.75,17.25)
  Top Layer w0.4: v1(9.25,9.25) 9.45,9.45 C2.2 FP1.2 12.25,8.7 v1(14.1,8.7) ; v1(21.75,8) R15.2 ; XP2.1@24.21,8.5 XP2.1
  Bottom Layer w0.2: R5.1 v1(16.75,17.25)
  Bottom Layer w0.4: v1(9.25,9.25) L1.1 ; v1(14.1,8.7) 15.4,8.7 15.9,8.2 18.7,8.2 19.4,8.9 20.85,8.9 v1(21.75,8) 22.4,8 22.92,8.52 XP2.1
pads on no net: A1.2 DD1.1 DD1.2 DD1.10 DD1.11 DD1.14 DD1.15 DD1.16 DD1.20 SB1.0 XP1.7 XS1.0 XS2.6 XS2.7 XS2.8 XS2.SH

## Polygon pours and split planes (outlines as drawn)
GND on Top Layer "GND_L01_P004" (solid, remove dead copper, pour order 4): 0,0 25.75,0 25.75,29.25 0,29.25
SH on Top Layer "SH_L01_P000" (solid, remove dead copper, pour order 0): 18.25,0 18.25,5.95 15.25,5.95 15.25,4.5 10.35,4.5 10.35,5.95 7.35,5.95 7.35,0
no net on Top Solder "GND_L02_P-001" (solid, remove dead copper): 0,31
GND on Bottom Layer "GND_L02_P002" (solid, remove dead copper, pour order 2): 0,0 25.75,0 25.75,29.25 0,29.25

## Silkscreen, mask and mechanical layers (free items; w line width, h text height)
Top Overlay:
  text "A_D" at 22.5,32.5 h1.5
  text ".PCB_Week" at 22.55,31.05 h1.5
  text "JLCJLCJLCJLC" at 9.5,26.5 h1.5
Bottom Overlay:
  text "RESET" at 5.75,26 h1.5
  text "PA14" at 22.75,25.75 h1.5
  text "NU" at 4,23.4 h1.5
  text "PA13" at 22.7,23.4 h1.5
  text "PA4" at 4.7,20.8 h1.5
  text "PA2" at 22.75,20.75 h1.5
  text "PA3" at 22.8,18.9 h1.5
  text "PA16" at 5,18.25 h1.5
  text "PA20" at 5.25,15.75 h1.5
  text "PA18" at 22.8,14.4 h1.5
  text "PA19" at 5,13.25 h1.5
  text "PA17" at 22.8,13 h1.5
  text "PA15" at 5,10.75 h1.5
  text "GND" at 22.75,10.5 h1.5
  text "VCC3" at 5,8.25 h1.5
  text "VCC5" at 22.75,8.25 h1.5
1 - Board Outline:
  the board outline again, w0.1
11 - Dementions (Top):
  lines w0.1: 12.8,0 12.8,4.5